# Altium PCB TEMPLATE_PCB_2L.PcbDoc (part 2 of 2)
Units mm, origin at the board's own origin, x right, y up, seen from the top; angles counter-clockwise.
Board outline 123.57 x 47.3 mm, 2 copper layers (Top, Bottom), stack 1.54 mm thick; 72 components, 49 nets, 284 pads, 147 vias.
Unrouted connection lines stored in the file: 24.
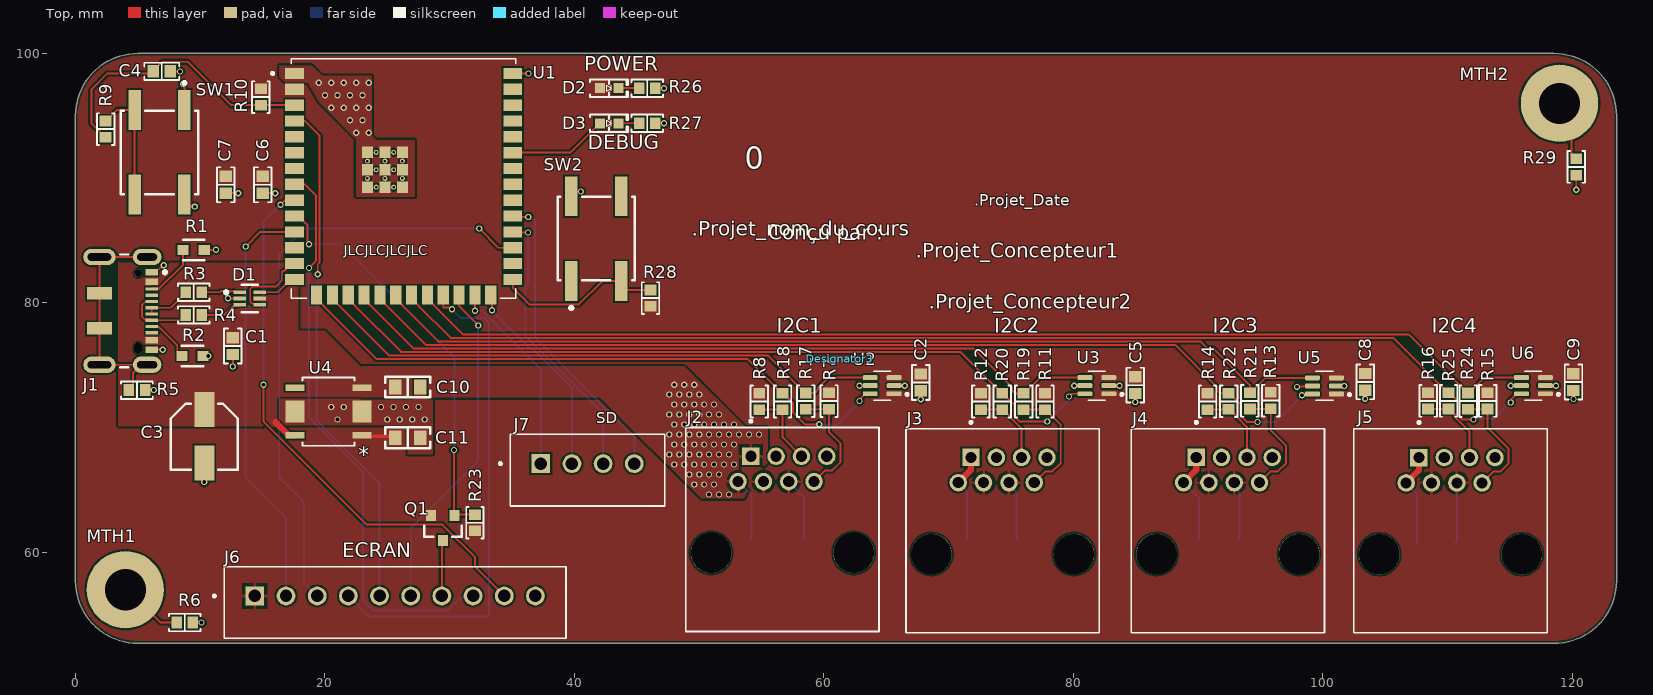
[diagram p0: Top view]

## Polygon pours and split planes (outlines as drawn) (continued)
GND on Top "NONET_L-01_P-001" (solid, pour order 3): 16.326,72.305 16.326,70.206 25.877,70.206 26.644,70.206 26.644,67.869 28.636,67.869 28.657,67.958 28.657,68.15 28.657,74.427 26.398,74.427 26.398,72.305
VCC on Top "NONET_L-01_P-001" (solid, remove dead copper, pour order 7): 23.983,73.76 19.976,77.766 17.868,77.766 17.868,83.213 3.426,83.213 3.426,70.125 23.983,70.044

## Silkscreen, mask and mechanical layers (free items; w line width, h text height)
Top Overlay:
  text "POWER" at 40.79,98.208 h2
  text "DEBUG" at 41.083,91.918 h2
  text "0" at 53.656,90.172 h3
  text ".Projet_Date" at 72.056,87.799 h0.91
  text ".Projet_nom_du_cours" at 49.399,84.99 h2
  text "Conçu par :" at 55.532,84.65 h2
  text "JLCJLCJLCJLC" at 21.512,83.829 h0.8
  text ".Projet_Concepteur1" at 67.387,83.222 h2
  text ".Projet_Concepteur2" at 68.414,79.114 h2
  text "I2C1" at 56.22,77.218 h2
  text "I2C2" at 73.66,77.218 h2
  text "I2C3" at 91.211,77.218 h2
  text "I2C4" at 108.772,77.218 h2
  text "SD" at 41.756,70.042 h1.52
  text "ECRAN" at 21.393,59.222 h2
Top Solder:
  drawing of 9 lines, arcs and shapes, not listed
Board Outline:
  the board outline again, w0.254

## Text inside footprints (layer, text, board x,y; h text height)
Designator3: Top Paste "181 MM" at -80.729,66.063 h1.78 r90; Top Paste "280 MM" at 68.271,-16.988 h1.78 r180; Top Paste "PCB Revision" at 194.942,31.02 h2 r90; Top Paste "TOP" at 197.271,133.012 h4 r90; Top Paste "STENCIL THICKNESS -" at 220.571,0.455 h6.5 r90
REV1: Bottom Overlay "PCB REV #" at 14.17,96.781 h1
SER1: Bottom Overlay "SERIAL #" at 8.046,97.023 h1
U4: Top Overlay "*" at 23.552,68.997 h1.27 r180; Top 3D Models "*" at 22.308,70.394 h1.27 r180